# EAGLE board CCS811-Panel (EAGLE 7.6.0)
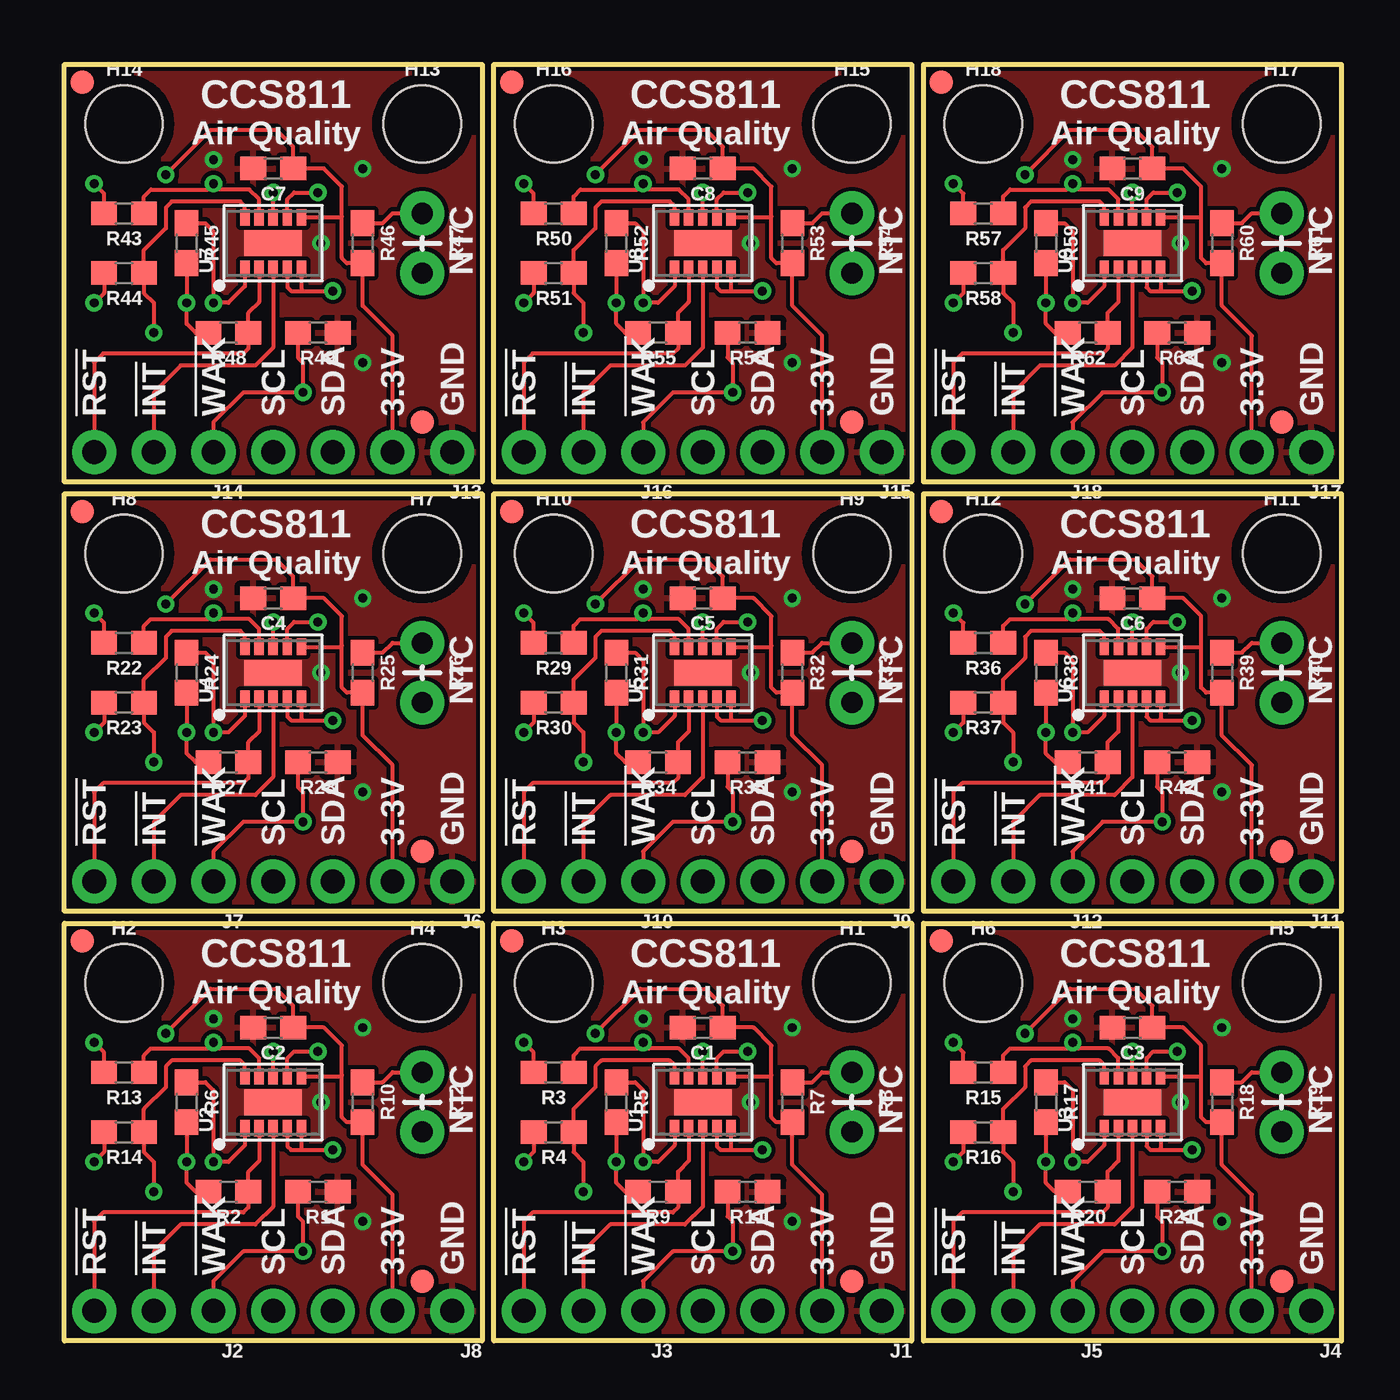
[diagram p0: board, top side]
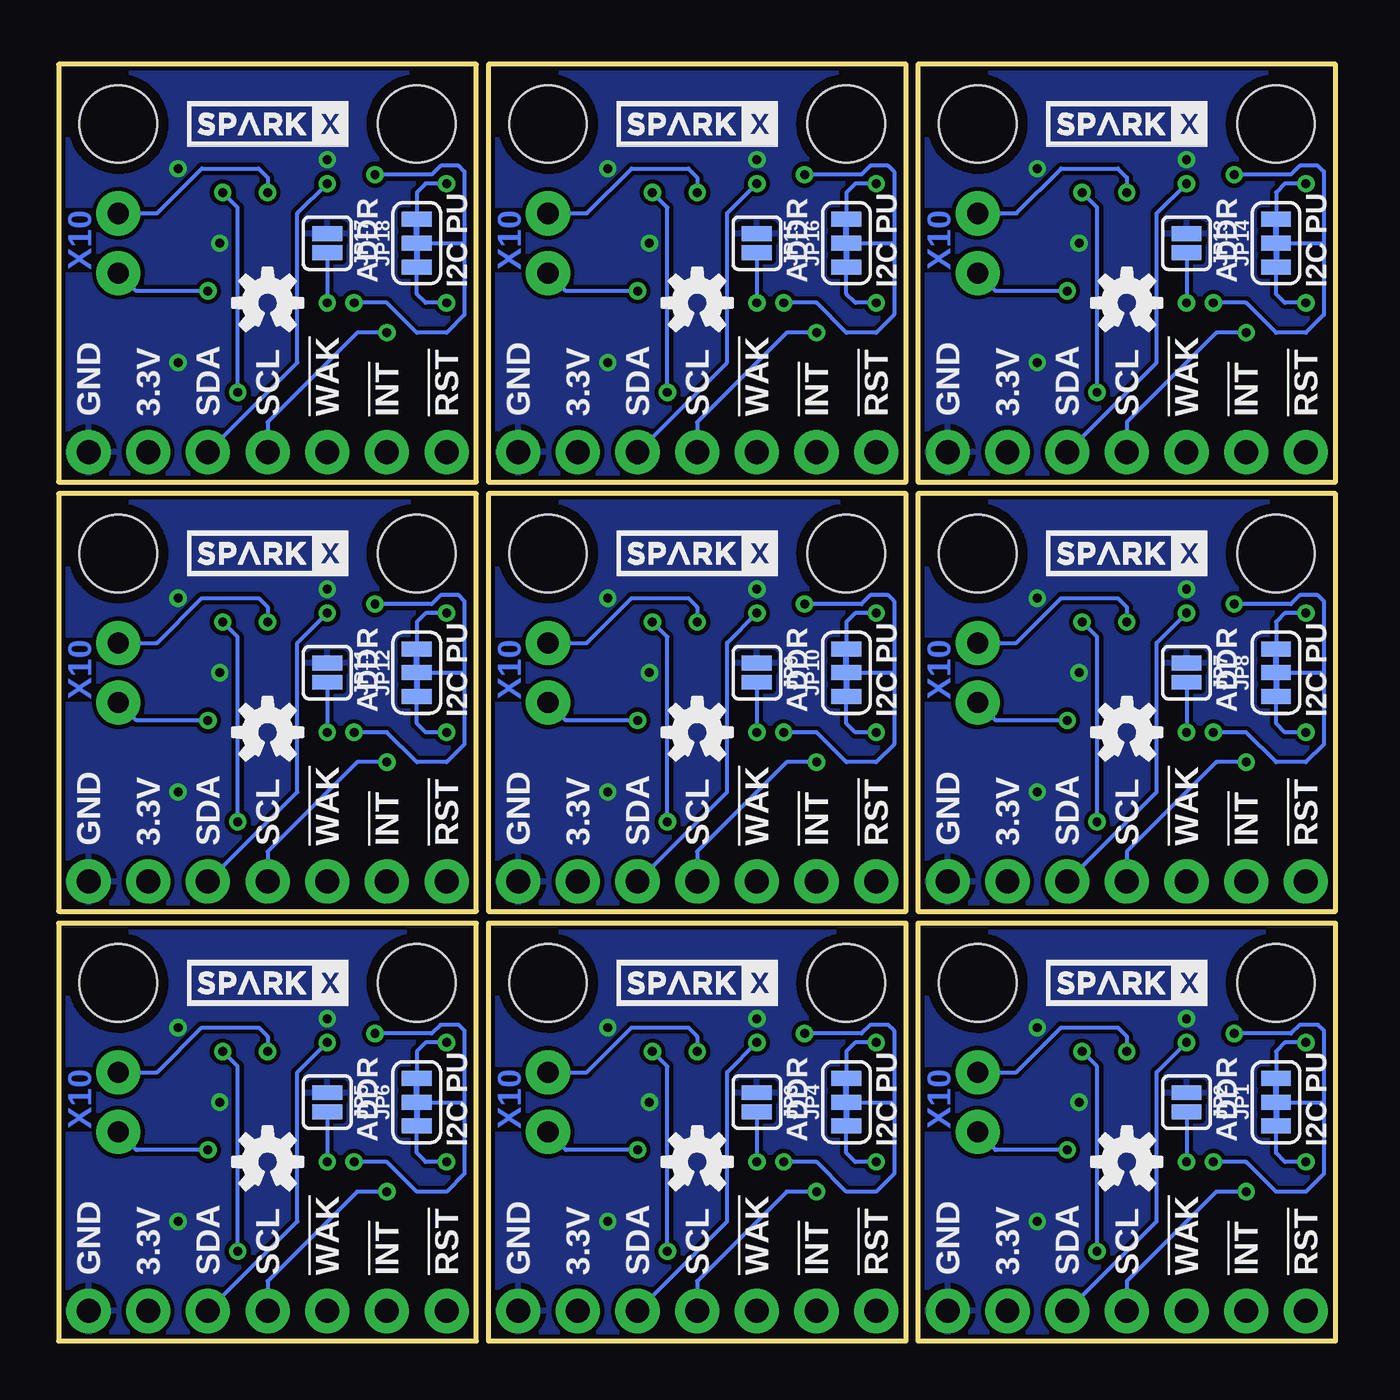
[diagram p1: board, bottom side, seen from below]

Size 54.36 x 54.36 mm. Coordinates in mm from the lower left corner, seen from the top.
Outline: 0,0 0,17.78 17.78,17.78 17.78,0 0,0
Outline: 18.29,0 18.29,17.78 36.07,17.78 36.07,0 18.29,0
Outline: 36.58,0 36.58,17.78 54.36,17.78 54.36,0 36.58,0
Outline: 0,18.29 0,36.07 17.78,36.07 17.78,18.29 0,18.29
Outline: 18.29,18.29 18.29,36.07 36.07,36.07 36.07,18.29 18.29,18.29
Outline: 36.58,18.29 36.58,36.07 54.36,36.07 54.36,18.29 36.58,18.29
Outline: 0,36.58 0,54.36 17.78,54.36 17.78,36.58 0,36.58
Outline: 18.29,36.58 18.29,54.36 36.07,54.36 36.07,36.58 18.29,36.58
Outline: 36.58,36.58 36.58,54.36 54.36,54.36 54.36,36.58 36.58,36.58
Copper layers (1*16): Top 0.035mm / dielectric 1.5mm / Bottom 0.035mm
Design rules "SparkFun-2-layer-TIGHT": minimum track width 7mil, minimum drill 15mil, track to track 7mil, track to pad 7mil, pad to pad 7mil, via to via 7mil, smd to smd 7mil, copper to edge 7mil, drill to drill 7mil, minimum pad ring 7mil, minimum via ring 7mil, stop-mask expansion 4mil, vias tented up to drill 25mil, thermal gap 10mil

## Footprints (pad centres in the part's own frame; a part is rotated, then mirrored left to right if it is on the bottom)
0603 = smd 1.1 x 1: 1 -0.85,0; 2 0.85,0
FIDUCIAL-1X2 = smd 1 x 1: 1 0,0
STAND-OFF = hole 3.302: 0,0
1X04_NO_SILK = drill 1.016 pad 1.88: 1 0,0; 2 2.54,0; 3 5.08,0; 4 7.62,0
1X03_NO_SILK = drill 1.016 pad 1.88: 1 0,0; 2 2.54,0; 3 5.08,0
SMT-JUMPER_3_2-NC_TRACE_SILK = smd 0.635 x 1.27: 1 -1.016,0; 2 0,0; 3 1.016,0
SMT-JUMPER_2_NO_SILK = smd 0.635 x 1.27: 1 -0.406,0; 2 0.406,0
AXIAL-0.1 = drill 0.9 pad 1.88: P$1 -1.27,0; P$2 1.27,0
LGA10 = smd 0.7 x 0.4: 1 -1.1,1.2; 2 -1.1,0.6; 3 -1.1,0; 4 -1.1,-0.6; 5 -1.1,-1.2; 6 1.1,-1.2; 7 1.1,-0.6; 8 1.1,0; 9 1.1,0.6; 10 1.1,1.2 | smd 1.1 x 2.45: EP 0,0

## Placement (x,y rotation side)
C1  1.0uF  [0603]  27.18,13.34 180 top
C2  1.0uF  [0603]  8.89,13.34 180 top
C3  1.0uF  [0603]  45.47,13.34 180 top
C4  1.0uF  [0603]  8.89,31.62 180 top
C5  1.0uF  [0603]  27.18,31.62 180 top
C6  1.0uF  [0603]  45.47,31.62 180 top
C7  1.0uF  [0603]  8.89,49.91 180 top
C8  1.0uF  [0603]  27.18,49.91 180 top
C9  1.0uF  [0603]  45.47,49.91 180 top
FD1  FIDUCIAL1X2  [FIDUCIAL-1X2]  0.76,17.02 0 top
FD2  FIDUCIAL1X2  [FIDUCIAL-1X2]  15.24,2.54 0 top
FD3  FIDUCIAL1X2  [FIDUCIAL-1X2]  19.05,17.02 0 top
FD4  FIDUCIAL1X2  [FIDUCIAL-1X2]  33.53,2.54 0 top
FD5  FIDUCIAL1X2  [FIDUCIAL-1X2]  37.34,17.02 0 top
FD6  FIDUCIAL1X2  [FIDUCIAL-1X2]  51.82,2.54 0 top
FD7  FIDUCIAL1X2  [FIDUCIAL-1X2]  0.76,35.31 0 top
FD8  FIDUCIAL1X2  [FIDUCIAL-1X2]  15.24,20.83 0 top
FD9  FIDUCIAL1X2  [FIDUCIAL-1X2]  19.05,35.31 0 top
FD10  FIDUCIAL1X2  [FIDUCIAL-1X2]  33.53,20.83 0 top
FD11  FIDUCIAL1X2  [FIDUCIAL-1X2]  37.34,35.31 0 top
FD12  FIDUCIAL1X2  [FIDUCIAL-1X2]  51.82,20.83 0 top
FD13  FIDUCIAL1X2  [FIDUCIAL-1X2]  0.76,53.59 0 top
FD14  FIDUCIAL1X2  [FIDUCIAL-1X2]  15.24,39.12 0 top
FD15  FIDUCIAL1X2  [FIDUCIAL-1X2]  19.05,53.59 0 top
FD16  FIDUCIAL1X2  [FIDUCIAL-1X2]  33.53,39.12 0 top
FD17  FIDUCIAL1X2  [FIDUCIAL-1X2]  37.34,53.59 0 top
FD18  FIDUCIAL1X2  [FIDUCIAL-1X2]  51.82,39.12 0 top
H1  STAND-OFF  [STAND-OFF]  33.53,15.24 0 top
H2  STAND-OFF  [STAND-OFF]  2.54,15.24 0 top
H3  STAND-OFF  [STAND-OFF]  20.83,15.24 0 top
H4  STAND-OFF  [STAND-OFF]  15.24,15.24 0 top
H5  STAND-OFF  [STAND-OFF]  51.82,15.24 0 top
H6  STAND-OFF  [STAND-OFF]  39.12,15.24 0 top
H7  STAND-OFF  [STAND-OFF]  15.24,33.53 0 top
H8  STAND-OFF  [STAND-OFF]  2.54,33.53 0 top
H9  STAND-OFF  [STAND-OFF]  33.53,33.53 0 top
H10  STAND-OFF  [STAND-OFF]  20.83,33.53 0 top
H11  STAND-OFF  [STAND-OFF]  51.82,33.53 0 top
H12  STAND-OFF  [STAND-OFF]  39.12,33.53 0 top
H13  STAND-OFF  [STAND-OFF]  15.24,51.82 0 top
H14  STAND-OFF  [STAND-OFF]  2.54,51.82 0 top
H15  STAND-OFF  [STAND-OFF]  33.53,51.82 0 top
H16  STAND-OFF  [STAND-OFF]  20.83,51.82 0 top
H17  STAND-OFF  [STAND-OFF]  51.82,51.82 0 top
H18  STAND-OFF  [STAND-OFF]  39.12,51.82 0 top
J1  [1X04_NO_SILK]  34.8,1.27 180 top
J2  [1X03_NO_SILK]  6.35,1.27 180 top
J3  [1X03_NO_SILK]  24.64,1.27 180 top
J4  [1X04_NO_SILK]  53.09,1.27 180 top
J5  [1X03_NO_SILK]  42.93,1.27 180 top
J6  [1X04_NO_SILK]  16.51,19.56 180 top
J7  [1X03_NO_SILK]  6.35,19.56 180 top
J8  [1X04_NO_SILK]  16.51,1.27 180 top
J9  [1X04_NO_SILK]  34.8,19.56 180 top
J10  [1X03_NO_SILK]  24.64,19.56 180 top
J11  [1X04_NO_SILK]  53.09,19.56 180 top
J12  [1X03_NO_SILK]  42.93,19.56 180 top
J13  [1X04_NO_SILK]  16.51,37.85 180 top
J14  [1X03_NO_SILK]  6.35,37.85 180 top
J15  [1X04_NO_SILK]  34.8,37.85 180 top
J16  [1X03_NO_SILK]  24.64,37.85 180 top
J17  [1X04_NO_SILK]  53.09,37.85 180 top
J18  [1X03_NO_SILK]  42.93,37.85 180 top
JP1  [SMT-JUMPER_3_2-NC_TRACE_SILK]  2.54,10.16 90 bottom
JP2  [SMT-JUMPER_2_NO_SILK]  6.35,10.16 270 bottom
JP3  [SMT-JUMPER_2_NO_SILK]  24.64,10.16 270 bottom
JP4  [SMT-JUMPER_3_2-NC_TRACE_SILK]  20.83,10.16 90 bottom
JP5  [SMT-JUMPER_2_NO_SILK]  42.93,10.16 270 bottom
JP6  [SMT-JUMPER_3_2-NC_TRACE_SILK]  39.12,10.16 90 bottom
JP7  [SMT-JUMPER_2_NO_SILK]  6.35,28.45 270 bottom
JP8  [SMT-JUMPER_3_2-NC_TRACE_SILK]  2.54,28.45 90 bottom
JP9  [SMT-JUMPER_2_NO_SILK]  24.64,28.45 270 bottom
JP10  [SMT-JUMPER_3_2-NC_TRACE_SILK]  20.83,28.45 90 bottom
JP11  [SMT-JUMPER_2_NO_SILK]  42.93,28.45 270 bottom
JP12  [SMT-JUMPER_3_2-NC_TRACE_SILK]  39.12,28.45 90 bottom
JP13  [SMT-JUMPER_2_NO_SILK]  6.35,46.74 270 bottom
JP14  [SMT-JUMPER_3_2-NC_TRACE_SILK]  2.54,46.74 90 bottom
JP15  [SMT-JUMPER_2_NO_SILK]  24.64,46.74 270 bottom
JP16  [SMT-JUMPER_3_2-NC_TRACE_SILK]  20.83,46.74 90 bottom
JP17  [SMT-JUMPER_2_NO_SILK]  42.93,46.74 270 bottom
JP18  [SMT-JUMPER_3_2-NC_TRACE_SILK]  39.12,46.74 90 bottom
LOGO1  OSHW-LOGOS  [OSHW-LOGO-S]  27.18,7.62 0 bottom
LOGO2  OSHW-LOGOS  [OSHW-LOGO-S]  45.47,7.62 0 bottom
LOGO3  OSHW-LOGOS  [OSHW-LOGO-S]  8.89,25.91 0 bottom
LOGO4  OSHW-LOGOS  [OSHW-LOGO-S]  8.89,7.62 0 bottom
LOGO5  OSHW-LOGOS  [OSHW-LOGO-S]  27.18,25.91 0 bottom
LOGO6  OSHW-LOGOS  [OSHW-LOGO-S]  45.47,25.91 0 bottom
LOGO7  OSHW-LOGOS  [OSHW-LOGO-S]  8.89,44.2 0 bottom
LOGO8  OSHW-LOGOS  [OSHW-LOGO-S]  27.18,44.2 0 bottom
LOGO9  OSHW-LOGOS  [OSHW-LOGO-S]  45.47,44.2 0 bottom
R1  100k  [0603]  10.79,6.35 180 top
R2  4.7k  [0603]  6.99,6.35 180 top
R3  4.7k  [0603]  20.83,11.43 180 top
R4  4.7k  [0603]  20.83,8.89 180 top
R5  100k  [0603]  23.5,10.16 270 top
R6  100k  [0603]  5.21,10.16 270 top
R7  10k  [0603]  30.99,10.16 270 top
R8  DNP  [AXIAL-0.1]  33.53,10.16 270 top
R9  4.7k  [0603]  25.27,6.35 180 top
R10  10k  [0603]  12.7,10.16 270 top
R11  100k  [0603]  29.08,6.35 180 top
R12  DNP  [AXIAL-0.1]  15.24,10.16 270 top
R13  4.7k  [0603]  2.54,11.43 180 top
R14  4.7k  [0603]  2.54,8.89 180 top
R15  4.7k  [0603]  39.12,11.43 180 top
R16  4.7k  [0603]  39.12,8.89 180 top
R17  100k  [0603]  41.78,10.16 270 top
R18  10k  [0603]  49.28,10.16 270 top
R19  DNP  [AXIAL-0.1]  51.82,10.16 270 top
R20  4.7k  [0603]  43.56,6.35 180 top
R21  100k  [0603]  47.37,6.35 180 top
R22  4.7k  [0603]  2.54,29.72 180 top
R23  4.7k  [0603]  2.54,27.18 180 top
R24  100k  [0603]  5.21,28.45 270 top
R25  10k  [0603]  12.7,28.45 270 top
R26  DNP  [AXIAL-0.1]  15.24,28.45 270 top
R27  4.7k  [0603]  6.99,24.64 180 top
R28  100k  [0603]  10.79,24.64 180 top
R29  4.7k  [0603]  20.83,29.72 180 top
R30  4.7k  [0603]  20.83,27.18 180 top
R31  100k  [0603]  23.5,28.45 270 top
R32  10k  [0603]  30.99,28.45 270 top
R33  DNP  [AXIAL-0.1]  33.53,28.45 270 top
R34  4.7k  [0603]  25.27,24.64 180 top
R35  100k  [0603]  29.08,24.64 180 top
R36  4.7k  [0603]  39.12,29.72 180 top
R37  4.7k  [0603]  39.12,27.18 180 top
R38  100k  [0603]  41.78,28.45 270 top
R39  10k  [0603]  49.28,28.45 270 top
R40  DNP  [AXIAL-0.1]  51.82,28.45 270 top
R41  4.7k  [0603]  43.56,24.64 180 top
R42  100k  [0603]  47.37,24.64 180 top
R43  4.7k  [0603]  2.54,48.01 180 top
R44  4.7k  [0603]  2.54,45.47 180 top
R45  100k  [0603]  5.21,46.74 270 top
R46  10k  [0603]  12.7,46.74 270 top
R47  DNP  [AXIAL-0.1]  15.24,46.74 270 top
R48  4.7k  [0603]  6.99,42.93 180 top
R49  100k  [0603]  10.79,42.93 180 top
R50  4.7k  [0603]  20.83,48.01 180 top
R51  4.7k  [0603]  20.83,45.47 180 top
R52  100k  [0603]  23.5,46.74 270 top
R53  10k  [0603]  30.99,46.74 270 top
R54  DNP  [AXIAL-0.1]  33.53,46.74 270 top
R55  4.7k  [0603]  25.27,42.93 180 top
R56  100k  [0603]  29.08,42.93 180 top
R57  4.7k  [0603]  39.12,48.01 180 top
R58  4.7k  [0603]  39.12,45.47 180 top
R59  100k  [0603]  41.78,46.74 270 top
R60  10k  [0603]  49.28,46.74 270 top
R61  DNP  [AXIAL-0.1]  51.82,46.74 270 top
R62  4.7k  [0603]  43.56,42.93 180 top
R63  100k  [0603]  47.37,42.93 180 top
U1  CCS811PRODUCTION  [LGA10]  27.18,10.16 90 top
U2  CCS811PRODUCTION  [LGA10]  8.89,10.16 90 top
U3  CCS811PRODUCTION  [LGA10]  45.47,10.16 90 top
U4  CCS811PRODUCTION  [LGA10]  8.89,28.45 90 top
U5  CCS811PRODUCTION  [LGA10]  27.18,28.45 90 top
U6  CCS811PRODUCTION  [LGA10]  45.47,28.45 90 top
U7  CCS811PRODUCTION  [LGA10]  8.89,46.74 90 top
U8  CCS811PRODUCTION  [LGA10]  27.18,46.74 90 top
U9  CCS811PRODUCTION  [LGA10]  45.47,46.74 90 top
U$1  SPARKX-LOGO3  [SPARKX-SMALL]  8.89,15.24 0 bottom
U$2  SPARKX-LOGO3  [SPARKX-SMALL]  27.18,15.24 0 bottom
U$3  SPARKX-LOGO3  [SPARKX-SMALL]  45.47,15.24 0 bottom
U$4  SPARKX-LOGO3  [SPARKX-SMALL]  8.89,33.53 0 bottom
U$5  SPARKX-LOGO3  [SPARKX-SMALL]  27.18,33.53 0 bottom
U$6  SPARKX-LOGO3  [SPARKX-SMALL]  45.47,33.53 0 bottom
U$7  SPARKX-LOGO3  [SPARKX-SMALL]  8.89,51.82 0 bottom
U$8  SPARKX-LOGO3  [SPARKX-SMALL]  27.18,51.82 0 bottom
U$9  SPARKX-LOGO3  [SPARKX-SMALL]  45.47,51.82 0 bottom

## Library data of the parts
C1-C9 = SparkFun-Capacitors; PROD_ID: CAP-00868
FD1-FD18 LOGO1-LOGO9 = SparkFun-Aesthetics
H1-H18 = SparkFun-Hardware
J1-J18 = SparkFun-Connectors
JP1-JP18 = SparkFun-Jumpers
R1 R5 R6 R11 R17 R21 R24 R28 R31 R35 R38 R42 R45 R49 R52 R56 R59 R63 = SparkFun-Resistors; PROD_ID: RES-07828
R2-R4 R9 R13-R16 R20 R22 R23 R27 R29 R30 R34 R36 R37 R41 R43 R44 R48 R50 R51 R55 R57 R58 R62 = SparkFun-Resistors; PROD_ID: RES-07857
R7 R10 R18 R25 R32 R39 R46 R53 R60 = SparkFun-Resistors; PROD_ID: RES-00824
R8 R12 R19 R26 R33 R40 R47 R54 R61 = esp32-environ-monitor-temp; PROD_ID: N/A; SF_ID: SEN-00250
U1-U9 U$1-U$9 = SparkX

## Nets
3.3V: C2.1 J8.2 JP1.2 R2.2 R6.2 R10.2 U2.6
3.3V1: C1.1 J1.2 JP4.2 R5.2 R7.2 R9.2 U1.6
3.3V2: C3.1 J4.2 JP6.2 R17.2 R18.2 R20.2 U3.6
3.3V3: C4.1 J6.2 JP8.2 R24.2 R25.2 R27.2 U4.6
3.3V4: C5.1 J9.2 JP10.2 R31.2 R32.2 R34.2 U5.6
3.3V5: C6.1 J11.2 JP12.2 R38.2 R39.2 R41.2 U6.6
3.3V6: C7.1 J13.2 JP14.2 R45.2 R46.2 R48.2 U7.6
3.3V7: C8.1 J15.2 JP16.2 R52.2 R53.2 R55.2 U8.6
3.3V8: C9.1 J17.2 JP18.2 R59.2 R60.2 R62.2 U9.6
!INT: J2.2 U2.3
!INT1: J3.2 U1.3
!INT2: J5.2 U3.3
!INT3: J7.2 U4.3
!INT4: J10.2 U5.3
!INT5: J12.2 U6.3
!INT6: J14.2 U7.3
!INT7: J16.2 U8.3
!INT8: J18.2 U9.3
!RST: J2.3 R2.1 U2.2
!RST1: J3.3 R9.1 U1.2
!RST2: J5.3 R20.1 U3.2
!RST3: J7.3 R27.1 U4.2
!RST4: J10.3 R34.1 U5.2
!RST5: J12.3 R41.1 U6.2
!RST6: J14.3 R48.1 U7.2
!RST7: J16.3 R55.1 U8.2
!RST8: J18.3 R62.1 U9.2
!WAKE: J2.1 R1.2 U2.7
!WAKE1: J3.1 R11.2 U1.7
!WAKE2: J5.1 R21.2 U3.7
!WAKE3: J7.1 R28.2 U4.7
!WAKE4: J10.1 R35.2 U5.7
!WAKE5: J12.1 R42.2 U6.7
!WAKE6: J14.1 R49.2 U7.7
!WAKE7: J16.1 R56.2 U8.7
!WAKE8: J18.1 R63.2 U9.7
AUX: R10.1 R12.P$1 U2.8
AUX1: R7.1 R8.P$1 U1.8
AUX2: R18.1 R19.P$1 U3.8
AUX3: R25.1 R26.P$1 U4.8
AUX4: R32.1 R33.P$1 U5.8
AUX5: R39.1 R40.P$1 U6.8
AUX6: R46.1 R47.P$1 U7.8
AUX7: R53.1 R54.P$1 U8.8
AUX8: R60.1 R61.P$1 U9.8
CCS811_ADDR: JP2.2 R6.1 U2.1
CCS811_ADDR1: JP3.2 R5.1 U1.1
CCS811_ADDR2: JP5.2 R17.1 U3.1
CCS811_ADDR3: JP7.2 R24.1 U4.1
CCS811_ADDR4: JP9.2 R31.1 U5.1
CCS811_ADDR5: JP11.2 R38.1 U6.1
CCS811_ADDR6: JP13.2 R45.1 U7.1
CCS811_ADDR7: JP15.2 R52.1 U8.1
CCS811_ADDR8: JP17.2 R59.1 U9.1
GND: C2.2 J8.1 JP2.1 R1.1 U2.EP
GND1: C1.2 J1.1 JP3.1 R11.1 U1.EP
GND2: C3.2 J4.1 JP5.1 R21.1 U3.EP
GND3: C4.2 J6.1 JP7.1 R28.1 U4.EP
GND4: C5.2 J9.1 JP9.1 R35.1 U5.EP
GND5: C6.2 J11.1 JP11.1 R42.1 U6.EP
GND6: C7.2 J13.1 JP13.1 R49.1 U7.EP
GND7: C8.2 J15.1 JP15.1 R56.1 U8.EP
GND8: C9.2 J17.1 JP17.1 R63.1 U9.EP
N$1: JP4.3 R3.2
N$2: JP4.1 R4.2
N$3: JP6.3 R15.2
N$4: JP1.3 R13.2
N$5: JP1.1 R14.2
N$6: JP6.1 R16.2
N$7: JP8.3 R22.2
N$8: JP8.1 R23.2
N$9: JP10.3 R29.2
N$10: JP10.1 R30.2
N$11: JP12.3 R36.2
N$12: JP12.1 R37.2
N$13: JP14.3 R43.2
N$14: JP14.1 R44.2
N$15: JP16.3 R50.2
N$16: JP16.1 R51.2
N$17: JP18.3 R57.2
N$18: JP18.1 R58.2
NTC_SENSE: R12.P$2 U2.4 U2.5
NTC_SENSE1: R8.P$2 U1.4 U1.5
NTC_SENSE2: R19.P$2 U3.4 U3.5
NTC_SENSE3: R26.P$2 U4.4 U4.5
NTC_SENSE4: R33.P$2 U5.4 U5.5
NTC_SENSE5: R40.P$2 U6.4 U6.5
NTC_SENSE6: R47.P$2 U7.4 U7.5
NTC_SENSE7: R54.P$2 U8.4 U8.5
NTC_SENSE8: R61.P$2 U9.4 U9.5
SCL: J8.4 R14.1 U2.10
SCL1: J1.4 R4.1 U1.10
SCL2: J4.4 R16.1 U3.10
SCL3: J6.4 R23.1 U4.10
SCL4: J9.4 R30.1 U5.10
SCL5: J11.4 R37.1 U6.10
SCL6: J13.4 R44.1 U7.10
SCL7: J15.4 R51.1 U8.10
SCL8: J17.4 R58.1 U9.10
SDA: J8.3 R13.1 U2.9
SDA1: J1.3 R3.1 U1.9
SDA2: J4.3 R15.1 U3.9
SDA3: J6.3 R22.1 U4.9
SDA4: J9.3 R29.1 U5.9
SDA5: J11.3 R36.1 U6.9
SDA6: J13.3 R43.1 U7.9
SDA7: J15.3 R50.1 U8.9
SDA8: J17.3 R57.1 U9.9

## Tracks (layer width: path | path; a pad name or v marks a point on that pad's centre or on a via)
3.3V  (via drill 0.38)
  Top 0.178: J8.2 13.97,6.22 12.7,7.49 R10.2 12.03,9.31 11.81,9.53 11.81,11.3 | U2.6 11.77,11.26 11.81,11.3 | v4.32,13.08 6.22,14.99 9.02,14.99 9.74,14.26 C2.1 11.05,13.34 11.81,12.57 11.81,11.3 | R6.2 v5.21,7.62 5.21,6.73 5.59,6.35 R2.2
  Bottom 0.178: v4.32,13.08 1.91,13.08 1.52,13.46 0.76,13.46 0.51,13.21 0.51,10.16 | 0.51,10.16 0.51,7.11 1.27,6.35 2.54,6.35 3.81,7.62 v5.21,7.62 | JP1.2 0.51,10.16
3.3V1  (via drill 0.38)
  Top 0.178: J1.2 32.26,6.22 30.99,7.49 R7.2 30.31,9.31 30.1,9.53 30.1,11.3 | U1.6 30.06,11.26 30.1,11.3 | v22.61,13.08 24.51,14.99 27.3,14.99 28.03,14.26 C1.1 29.34,13.34 30.1,12.57 30.1,11.3 | R5.2 v23.5,7.62 23.5,6.73 23.88,6.35 R9.2
  Bottom 0.178: v22.61,13.08 20.19,13.08 19.81,13.46 19.05,13.46 18.8,13.21 18.8,10.16 | 18.8,10.16 18.8,7.11 19.56,6.35 20.83,6.35 22.1,7.62 v23.5,7.62 | JP4.2 18.8,10.16
3.3V2  (via drill 0.38)
  Top 0.178: J4.2 50.55,6.22 49.28,7.49 R18.2 48.6,9.31 48.39,9.53 48.39,11.3 | U3.6 48.34,11.26 48.39,11.3 | v40.89,13.08 42.8,14.99 45.59,14.99 46.32,14.26 C3.1 47.62,13.34 48.39,12.57 48.39,11.3 | R17.2 v41.78,7.62 41.78,6.73 42.16,6.35 R20.2
  Bottom 0.178: v40.89,13.08 38.48,13.08 38.1,13.46 37.34,13.46 37.08,13.21 37.08,10.16 | 37.08,10.16 37.08,7.11 37.85,6.35 39.12,6.35 40.39,7.62 v41.78,7.62 | JP6.2 37.08,10.16
3.3V3  (via drill 0.38)
  Top 0.178: J6.2 13.97,24.51 12.7,25.78 R25.2 12.03,27.6 11.81,27.81 11.81,29.59 | U4.6 11.77,29.55 11.81,29.59 | v4.32,31.37 6.22,33.27 9.02,33.27 9.74,32.55 C4.1 11.05,31.62 11.81,30.86 11.81,29.59 | R24.2 v5.21,25.91 5.21,25.02 5.59,24.64 R27.2
  Bottom 0.178: v4.32,31.37 1.91,31.37 1.52,31.75 0.76,31.75 0.51,31.5 0.51,28.45 | 0.51,28.45 0.51,25.4 1.27,24.64 2.54,24.64 3.81,25.91 v5.21,25.91 | JP8.2 0.51,28.45
3.3V4  (via drill 0.38)
  Top 0.178: J9.2 32.26,24.51 30.99,25.78 R32.2 30.31,27.6 30.1,27.81 30.1,29.59 | U5.6 30.06,29.55 30.1,29.59 | v22.61,31.37 24.51,33.27 27.3,33.27 28.03,32.55 C5.1 29.34,31.62 30.1,30.86 30.1,29.59 | R31.2 v23.5,25.91 23.5,25.02 23.88,24.64 R34.2
  Bottom 0.178: v22.61,31.37 20.19,31.37 19.81,31.75 19.05,31.75 18.8,31.5 18.8,28.45 | 18.8,28.45 18.8,25.4 19.56,24.64 20.83,24.64 22.1,25.91 v23.5,25.91 | JP10.2 18.8,28.45
3.3V5  (via drill 0.38)
  Top 0.178: J11.2 50.55,24.51 49.28,25.78 R39.2 48.6,27.6 48.39,27.81 48.39,29.59 | U6.6 48.34,29.55 48.39,29.59 | v40.89,31.37 42.8,33.27 45.59,33.27 46.32,32.55 C6.1 47.62,31.62 48.39,30.86 48.39,29.59 | R38.2 v41.78,25.91 41.78,25.02 42.16,24.64 R41.2
  Bottom 0.178: v40.89,31.37 38.48,31.37 38.1,31.75 37.34,31.75 37.08,31.5 37.08,28.45 | 37.08,28.45 37.08,25.4 37.85,24.64 39.12,24.64 40.39,25.91 v41.78,25.91 | JP12.2 37.08,28.45
3.3V6  (via drill 0.38)
  Top 0.178: J13.2 13.97,42.8 12.7,44.07 R46.2 12.03,45.89 11.81,46.1 11.81,47.88 | U7.6 11.77,47.84 11.81,47.88 | v4.32,49.66 6.22,51.56 9.02,51.56 9.74,50.84 C7.1 11.05,49.91 11.81,49.15 11.81,47.88 | R45.2 v5.21,44.2 5.21,43.31 5.59,42.93 R48.2
  Bottom 0.178: v4.32,49.66 1.91,49.66 1.52,50.04 0.76,50.04 0.51,49.78 0.51,46.74 | 0.51,46.74 0.51,43.69 1.27,42.93 2.54,42.93 3.81,44.2 v5.21,44.2 | JP14.2 0.51,46.74
3.3V7  (via drill 0.38)
  Top 0.178: J15.2 32.26,42.8 30.99,44.07 R53.2 30.31,45.89 30.1,46.1 30.1,47.88 | U8.6 30.06,47.84 30.1,47.88 | v22.61,49.66 24.51,51.56 27.3,51.56 28.03,50.84 C8.1 29.34,49.91 30.1,49.15 30.1,47.88 | R52.2 v23.5,44.2 23.5,43.31 23.88,42.93 R55.2
  Bottom 0.178: v22.61,49.66 20.19,49.66 19.81,50.04 19.05,50.04 18.8,49.78 18.8,46.74 | 18.8,46.74 18.8,43.69 19.56,42.93 20.83,42.93 22.1,44.2 v23.5,44.2 | JP16.2 18.8,46.74
3.3V8  (via drill 0.38)
  Top 0.178: J17.2 50.55,42.8 49.28,44.07 R60.2 48.6,45.89 48.39,46.1 48.39,47.88 | U9.6 48.34,47.84 48.39,47.88 | v40.89,49.66 42.8,51.56 45.59,51.56 46.32,50.84 C9.1 47.62,49.91 48.39,49.15 48.39,47.88 | R59.2 v41.78,44.2 41.78,43.31 42.16,42.93 R62.2
  Bottom 0.178: v40.89,49.66 38.48,49.66 38.1,50.04 37.34,50.04 37.08,49.78 37.08,46.74 | 37.08,46.74 37.08,43.69 37.85,42.93 39.12,42.93 40.39,44.2 v41.78,44.2 | JP18.2 37.08,46.74
!INT
  Top 0.178: U2.3 8.89,5.71 8.13,4.95 4.95,4.95 3.81,3.81 J2.2
!INT1
  Top 0.178: U1.3 27.18,5.71 26.42,4.95 23.24,4.95 22.1,3.81 J3.2
!INT2
  Top 0.178: U3.3 45.47,5.71 44.7,4.95 41.53,4.95 40.39,3.81 J5.2
!INT3
  Top 0.178: U4.3 8.89,24 8.13,23.24 4.95,23.24 3.81,22.1 J7.2
!INT4
  Top 0.178: U5.3 27.18,24 26.42,23.24 23.24,23.24 22.1,22.1 J10.2
!INT5
  Top 0.178: U6.3 45.47,24 44.7,23.24 41.53,23.24 40.39,22.1 J12.2
!INT6
  Top 0.178: U7.3 8.89,42.29 8.13,41.53 4.95,41.53 3.81,40.39 J14.2
!INT7
  Top 0.178: U8.3 27.18,42.29 26.42,41.53 23.24,41.53 22.1,40.39 J16.2
!INT8
  Top 0.178: U9.3 45.47,42.29 44.7,41.53 41.53,41.53 40.39,40.39 J18.2
!RST
  Top 0.178: U2.2 8.29,7.66 7.83,7.2 R2.1 7.83,5.68 7.62,5.46 1.65,5.46 1.27,5.08 J2.3
!RST1
  Top 0.178: U1.2 26.58,7.66 26.12,7.2 R9.1 26.12,5.68 25.91,5.46 19.94,5.46 19.56,5.08 J3.3
!RST2
  Top 0.178: U3.2 44.87,7.66 44.41,7.2 R20.1 44.41,5.68 44.2,5.46 38.23,5.46 37.85,5.08 J5.3
!RST3
  Top 0.178: U4.2 8.29,25.94 7.83,25.49 R27.1 7.83,23.96 7.62,23.75 1.65,23.75 1.27,23.37 J7.3
!RST4
  Top 0.178: U5.2 26.58,25.94 26.12,25.49 R34.1 26.12,23.96 25.91,23.75 19.94,23.75 19.56,23.37 J10.3
!RST5
  Top 0.178: U6.2 44.87,25.94 44.41,25.49 R41.1 44.41,23.96 44.2,23.75 38.23,23.75 37.85,23.37 J12.3
!RST6
  Top 0.178: U7.2 8.29,44.23 7.83,43.78 R48.1 7.83,42.25 7.62,42.04 1.65,42.04 1.27,41.66 J14.3
!RST7
  Top 0.178: U8.2 26.58,44.23 26.12,43.78 R55.1 26.12,42.25 25.91,42.04 19.94,42.04 19.56,41.66 J16.3
!RST8
  Top 0.178: U9.2 44.87,44.23 44.41,43.78 R62.1 44.41,42.25 44.2,42.04 38.23,42.04 37.85,41.66 J18.3
!WAKE  (via drill 0.38)
  Top 0.178: U2.7 9.49,12.03 9.78,12.32 v10.79,12.32 | J2.1 6.35,2.54 7.62,3.81 v10.16,3.81 10.16,5.08 9.95,5.29 R1.2
  Bottom 0.178: v10.16,3.81 10.16,11.68 v10.79,12.32
!WAKE1  (via drill 0.38)
  Top 0.178: U1.7 27.78,12.03 28.07,12.32 v29.08,12.32 | J3.1 24.64,2.54 25.91,3.81 v28.45,3.81 28.45,5.08 28.23,5.29 R11.2
  Bottom 0.178: v28.45,3.81 28.45,11.68 v29.08,12.32
!WAKE2  (via drill 0.38)
  Top 0.178: U3.7 46.07,12.03 46.35,12.32 v47.37,12.32 | J5.1 42.93,2.54 44.2,3.81 v46.74,3.81 46.74,5.08 46.52,5.29 R21.2
  Bottom 0.178: v46.74,3.81 46.74,11.68 v47.37,12.32
!WAKE3  (via drill 0.38)
  Top 0.178: U4.7 9.49,30.32 9.78,30.61 v10.79,30.61 | J7.1 6.35,20.83 7.62,22.1 v10.16,22.1 10.16,23.37 9.95,23.58 R28.2
  Bottom 0.178: v10.16,22.1 10.16,29.97 v10.79,30.61
!WAKE4  (via drill 0.38)
  Top 0.178: U5.7 27.78,30.32 28.07,30.61 v29.08,30.61 | J10.1 24.64,20.83 25.91,22.1 v28.45,22.1 28.45,23.37 28.23,23.58 R35.2
  Bottom 0.178: v28.45,22.1 28.45,29.97 v29.08,30.61
!WAKE5  (via drill 0.38)
  Top 0.178: U6.7 46.07,30.32 46.35,30.61 v47.37,30.61 | J12.1 42.93,20.83 44.2,22.1 v46.74,22.1 46.74,23.37 46.52,23.58 R42.2
  Bottom 0.178: v46.74,22.1 46.74,29.97 v47.37,30.61
!WAKE6  (via drill 0.38)
  Top 0.178: U7.7 9.49,48.61 9.78,48.9 v10.79,48.9 | J14.1 6.35,39.12 7.62,40.39 v10.16,40.39 10.16,41.66 9.95,41.87 R49.2
  Bottom 0.178: v10.16,40.39 10.16,48.26 v10.79,48.9
!WAKE7  (via drill 0.38)
  Top 0.178: U8.7 27.78,48.61 28.07,48.9 v29.08,48.9 | J16.1 24.64,39.12 25.91,40.39 v28.45,40.39 28.45,41.66 28.23,41.87 R56.2
  Bottom 0.178: v28.45,40.39 28.45,48.26 v29.08,48.9
!WAKE8  (via drill 0.38)
  Top 0.178: U9.7 46.07,48.61 46.35,48.9 v47.37,48.9 | J18.1 42.93,39.12 44.2,40.39 v46.74,40.39 46.74,41.66 46.52,41.87 R63.2
  Bottom 0.178: v46.74,40.39 46.74,48.26 v47.37,48.9
AUX  (via drill 0.38)
  Top 0.178: R10.1 13.55,11.01 13.97,11.43 R12.P$1 | U2.8 v8.89,12.32
  Bottom 0.178: v8.89,12.32 8.89,12.95 9.27,13.34 11.68,13.34 13.59,11.43 R12.P$1
AUX1  (via drill 0.38)
  Top 0.178: R7.1 31.84,11.01 32.26,11.43 R8.P$1 | U1.8 v27.18,12.32
  Bottom 0.178: v27.18,12.32 27.18,12.95 27.56,13.34 29.97,13.34 31.88,11.43 R8.P$1
AUX2  (via drill 0.38)
  Top 0.178: R18.1 50.13,11.01 50.55,11.43 R19.P$1 | U3.8 v45.47,12.32
  Bottom 0.178: v45.47,12.32 45.47,12.95 45.85,13.34 48.26,13.34 50.16,11.43 R19.P$1
AUX3  (via drill 0.38)
  Top 0.178: R25.1 13.55,29.3 13.97,29.72 R26.P$1 | U4.8 v8.89,30.61
  Bottom 0.178: v8.89,30.61 8.89,31.24 9.27,31.62 11.68,31.62 13.59,29.72 R26.P$1
AUX4  (via drill 0.38)
  Top 0.178: R32.1 31.84,29.3 32.26,29.72 R33.P$1 | U5.8 v27.18,30.61
  Bottom 0.178: v27.18,30.61 27.18,31.24 27.56,31.62 29.97,31.62 31.88,29.72 R33.P$1
AUX5  (via drill 0.38)
  Top 0.178: R39.1 50.13,29.3 50.55,29.72 R40.P$1 | U6.8 v45.47,30.61
  Bottom 0.178: v45.47,30.61 45.47,31.24 45.85,31.62 48.26,31.62 50.16,29.72 R40.P$1
AUX6  (via drill 0.38)
  Top 0.178: R46.1 13.55,47.59 13.97,48.01 R47.P$1 | U7.8 v8.89,48.9
  Bottom 0.178: v8.89,48.9 8.89,49.53 9.27,49.91 11.68,49.91 13.59,48.01 R47.P$1
AUX7  (via drill 0.38)
  Top 0.178: R53.1 31.84,47.59 32.26,48.01 R54.P$1 | U8.8 v27.18,48.9
  Bottom 0.178: v27.18,48.9 27.18,49.53 27.56,49.91 29.97,49.91 31.88,48.01 R54.P$1
AUX8  (via drill 0.38)
  Top 0.178: R60.1 50.13,47.59 50.55,48.01 R61.P$1 | U9.8 v45.47,48.9
  Bottom 0.178: v45.47,48.9 45.47,49.53 45.85,49.91 48.26,49.91 50.16,48.01 R61.P$1
CCS811_ADDR  (via drill 0.38)
  Top 0.178: R6.1 6.01,11.01 6.35,10.67 v6.35,7.62 6.99,7.62 7.69,8.32 U2.1
  Bottom 0.178: JP2.2 v6.35,7.62
CCS811_ADDR1  (via drill 0.38)
  Top 0.178: R5.1 24.3,11.01 24.64,10.67 v24.64,7.62 25.27,7.62 25.98,8.32 U1.1
  Bottom 0.178: JP3.2 v24.64,7.62
CCS811_ADDR2  (via drill 0.38)
  Top 0.178: R17.1 42.58,11.01 42.93,10.67 v42.93,7.62 43.56,7.62 44.27,8.32 U3.1
  Bottom 0.178: JP5.2 v42.93,7.62
CCS811_ADDR3  (via drill 0.38)
  Top 0.178: R24.1 6.01,29.3 6.35,28.96 v6.35,25.91 6.99,25.91 7.69,26.61 U4.1
  Bottom 0.178: JP7.2 v6.35,25.91
CCS811_ADDR4  (via drill 0.38)
  Top 0.178: R31.1 24.3,29.3 24.64,28.96 v24.64,25.91 25.27,25.91 25.98,26.61 U5.1
  Bottom 0.178: JP9.2 v24.64,25.91
CCS811_ADDR5  (via drill 0.38)
  Top 0.178: R38.1 42.58,29.3 42.93,28.96 v42.93,25.91 43.56,25.91 44.27,26.61 U6.1
  Bottom 0.178: JP11.2 v42.93,25.91
CCS811_ADDR6  (via drill 0.38)
  Top 0.178: R45.1 6.01,47.59 6.35,47.24 v6.35,44.2 6.99,44.2 7.69,44.9 U7.1
  Bottom 0.178: JP13.2 v6.35,44.2
CCS811_ADDR7  (via drill 0.38)
  Top 0.178: R52.1 24.3,47.59 24.64,47.24 v24.64,44.2 25.27,44.2 25.98,44.9 U8.1
  Bottom 0.178: JP15.2 v24.64,44.2
CCS811_ADDR8  (via drill 0.38)
  Top 0.178: R59.1 42.58,47.59 42.93,47.24 v42.93,44.2 43.56,44.2 44.27,44.9 U9.1
  Bottom 0.178: JP17.2 v42.93,44.2
GND  (via drill 0.38)
  other vias: 6.35,13.72 10.92,10.16 12.7,13.34 12.7,5.08
  pour Top (isolate 0.178): 0,0 17.78,0 17.78,17.78 0,17.78
  pour Bottom (isolate 0.178): 0,17.78 17.78,17.78 17.78,0 0,0
GND1  (via drill 0.38)
  other vias: 24.64,13.72 29.21,10.16 30.99,13.34 30.99,5.08
  pour Top (isolate 0.178): 18.29,0 36.07,0 36.07,17.78 18.29,17.78
  pour Bottom (isolate 0.178): 18.29,17.78 36.07,17.78 36.07,0 18.29,0
GND2  (via drill 0.38)
  other vias: 42.93,13.72 47.5,10.16 49.28,13.34 49.28,5.08
  pour Top (isolate 0.178): 36.58,0 54.36,0 54.36,17.78 36.58,17.78
  pour Bottom (isolate 0.178): 36.58,17.78 54.36,17.78 54.36,0 36.58,0
GND3  (via drill 0.38)
  other vias: 6.35,32 10.92,28.45 12.7,31.62 12.7,23.37
  pour Top (isolate 0.178): 0,18.29 17.78,18.29 17.78,36.07 0,36.07
  pour Bottom (isolate 0.178): 0,36.07 17.78,36.07 17.78,18.29 0,18.29
GND4  (via drill 0.38)
  other vias: 24.64,32 29.21,28.45 30.99,31.62 30.99,23.37
  pour Top (isolate 0.178): 18.29,18.29 36.07,18.29 36.07,36.07 18.29,36.07
  pour Bottom (isolate 0.178): 18.29,36.07 36.07,36.07 36.07,18.29 18.29,18.29
GND5  (via drill 0.38)
  other vias: 42.93,32 47.5,28.45 49.28,31.62 49.28,23.37
  pour Top (isolate 0.178): 36.58,18.29 54.36,18.29 54.36,36.07 36.58,36.07
  pour Bottom (isolate 0.178): 36.58,36.07 54.36,36.07 54.36,18.29 36.58,18.29
GND6  (via drill 0.38)
  other vias: 6.35,50.29 10.92,46.74 12.7,49.91 12.7,41.66
  pour Top (isolate 0.178): 0,36.58 17.78,36.58 17.78,54.36 0,54.36
  pour Bottom (isolate 0.178): 0,54.36 17.78,54.36 17.78,36.58 0,36.58
GND7  (via drill 0.38)
  other vias: 24.64,50.29 29.21,46.74 30.99,49.91 30.99,41.66
  pour Top (isolate 0.178): 18.29,36.58 36.07,36.58 36.07,54.36 18.29,54.36
  pour Bottom (isolate 0.178): 18.29,54.36 36.07,54.36 36.07,36.58 18.29,36.58
GND8  (via drill 0.38)
  other vias: 42.93,50.29 47.5,46.74 49.28,49.91 49.28,41.66
  pour Top (isolate 0.178): 36.58,36.58 54.36,36.58 54.36,54.36 36.58,54.36
  pour Bottom (isolate 0.178): 36.58,54.36 54.36,54.36 54.36,36.58 36.58,36.58
N$1  (via drill 0.38)
  Top 0.178: R3.2 19.98,12.28 v19.56,12.7
  Bottom 0.178: v19.56,12.7 20.45,12.7 20.83,12.32 JP4.3
N$2  (via drill 0.38)
  Top 0.178: R4.2 19.98,8.04 v19.56,7.62
  Bottom 0.178: v19.56,7.62 20.45,7.62 20.83,8 JP4.1
N$3  (via drill 0.38)
  Top 0.178: R15.2 38.27,12.28 v37.85,12.7
  Bottom 0.178: v37.85,12.7 38.73,12.7 39.12,12.32 JP6.3
N$4  (via drill 0.38)
  Top 0.178: R13.2 1.69,12.28 v1.27,12.7
  Bottom 0.178: v1.27,12.7 2.16,12.7 2.54,12.32 JP1.3
N$5  (via drill 0.38)
  Top 0.178: R14.2 1.69,8.04 v1.27,7.62
  Bottom 0.178: v1.27,7.62 2.16,7.62 2.54,8 JP1.1
N$6  (via drill 0.38)
  Top 0.178: R16.2 38.27,8.04 v37.85,7.62
  Bottom 0.178: v37.85,7.62 38.73,7.62 39.12,8 JP6.1
N$7  (via drill 0.38)
  Top 0.178: R22.2 1.69,30.57 v1.27,30.99
  Bottom 0.178: v1.27,30.99 2.16,30.99 2.54,30.61 JP8.3
N$8  (via drill 0.38)
  Top 0.178: R23.2 1.69,26.33 v1.27,25.91
  Bottom 0.178: v1.27,25.91 2.16,25.91 2.54,26.29 JP8.1
N$9  (via drill 0.38)
  Top 0.178: R29.2 19.98,30.57 v19.56,30.99
  Bottom 0.178: v19.56,30.99 20.45,30.99 20.83,30.61 JP10.3
N$10  (via drill 0.38)
  Top 0.178: R30.2 19.98,26.33 v19.56,25.91
  Bottom 0.178: v19.56,25.91 20.45,25.91 20.83,26.29 JP10.1
N$11  (via drill 0.38)
  Top 0.178: R36.2 38.27,30.57 v37.85,30.99
  Bottom 0.178: v37.85,30.99 38.73,30.99 39.12,30.61 JP12.3
N$12  (via drill 0.38)
  Top 0.178: R37.2 38.27,26.33 v37.85,25.91
  Bottom 0.178: v37.85,25.91 38.73,25.91 39.12,26.29 JP12.1
N$13  (via drill 0.38)
  Top 0.178: R43.2 1.69,48.86 v1.27,49.28
  Bottom 0.178: v1.27,49.28 2.16,49.28 2.54,48.9 JP14.3
N$14  (via drill 0.38)
  Top 0.178: R44.2 1.69,44.62 v1.27,44.2
  Bottom 0.178: v1.27,44.2 2.16,44.2 2.54,44.58 JP14.1
N$15  (via drill 0.38)
  Top 0.178: R50.2 19.98,48.86 v19.56,49.28
  Bottom 0.178: v19.56,49.28 20.45,49.28 20.83,48.9 JP16.3
N$16  (via drill 0.38)
  Top 0.178: R51.2 19.98,44.62 v19.56,44.2
  Bottom 0.178: v19.56,44.2 20.45,44.2 20.83,44.58 JP16.1
N$17  (via drill 0.38)
  Top 0.178: R57.2 38.27,48.86 v37.85,49.28
  Bottom 0.178: v37.85,49.28 38.73,49.28 39.12,48.9 JP18.3
N$18  (via drill 0.38)
  Top 0.178: R58.2 38.27,44.62 v37.85,44.2
  Bottom 0.178: v37.85,44.2 38.73,44.2 39.12,44.58 JP18.1
NTC_SENSE  (via drill 0.38)
  Top 0.178: 10.16,8.13 9.65,8.13 9.49,8.29 U2.4 | 10.16,8.13 v11.43,8.13 | U2.5 10.09,8.2 10.16,8.13
  Bottom 0.178: v11.43,8.13 14.48,8.13 R12.P$2
NTC_SENSE1  (via drill 0.38)
  Top 0.178: 28.45,8.13 27.94,8.13 27.78,8.29 U1.4 | 28.45,8.13 v29.72,8.13 | U1.5 28.38,8.2 28.45,8.13
  Bottom 0.178: v29.72,8.13 32.77,8.13 R8.P$2
NTC_SENSE2  (via drill 0.38)
  Top 0.178: 46.74,8.13 46.23,8.13 46.07,8.29 U3.4 | 46.74,8.13 v48.01,8.13 | U3.5 46.67,8.2 46.74,8.13
  Bottom 0.178: v48.01,8.13 51.05,8.13 R19.P$2
NTC_SENSE3  (via drill 0.38)
  Top 0.178: 10.16,26.42 9.65,26.42 9.49,26.58 U4.4 | 10.16,26.42 v11.43,26.42 | U4.5 10.09,26.49 10.16,26.42
  Bottom 0.178: v11.43,26.42 14.48,26.42 R26.P$2
NTC_SENSE4  (via drill 0.38)
  Top 0.178: 28.45,26.42 27.94,26.42 27.78,26.58 U5.4 | 28.45,26.42 v29.72,26.42 | U5.5 28.38,26.49 28.45,26.42
  Bottom 0.178: v29.72,26.42 32.77,26.42 R33.P$2
NTC_SENSE5  (via drill 0.38)
  Top 0.178: 46.74,26.42 46.23,26.42 46.07,26.58 U6.4 | 46.74,26.42 v48.01,26.42 | U6.5 46.67,26.49 46.74,26.42
  Bottom 0.178: v48.01,26.42 51.05,26.42 R40.P$2
NTC_SENSE6  (via drill 0.38)
  Top 0.178: 10.16,44.7 9.65,44.7 9.49,44.87 U7.4 | 10.16,44.7 v11.43,44.7 | U7.5 10.09,44.77 10.16,44.7
  Bottom 0.178: v11.43,44.7 14.48,44.7 R47.P$2
NTC_SENSE7  (via drill 0.38)
  Top 0.178: 28.45,44.7 27.94,44.7 27.78,44.87 U8.4 | 28.45,44.7 v29.72,44.7 | U8.5 28.38,44.77 28.45,44.7
  Bottom 0.178: v29.72,44.7 32.77,44.7 R54.P$2
NTC_SENSE8  (via drill 0.38)
  Top 0.178: 46.74,44.7 46.23,44.7 46.07,44.87 U9.4 | 46.74,44.7 v48.01,44.7 | U9.5 46.67,44.77 46.74,44.7
  Bottom 0.178: v48.01,44.7 51.05,44.7 R61.P$2
SCL  (via drill 0.38)
  Top 0.178: v3.81,6.35 3.81,7.62 3.39,8.04 R14.1 3.39,9.87 4.32,10.79 4.32,11.68 4.57,11.94 7.49,11.94 7.69,11.74 U2.10
  Bottom 0.178: v3.81,6.35 5.08,6.35 8.89,2.54 J8.4
SCL1  (via drill 0.38)
  Top 0.178: v22.1,6.35 22.1,7.62 21.68,8.04 R4.1 21.68,9.87 22.61,10.79 22.61,11.68 22.86,11.94 25.78,11.94 25.98,11.74 U1.10
  Bottom 0.178: v22.1,6.35 23.37,6.35 27.18,2.54 J1.4
SCL2  (via drill 0.38)
  Top 0.178: v40.39,6.35 40.39,7.62 39.97,8.04 R16.1 39.97,9.87 40.89,10.79 40.89,11.68 41.15,11.94 44.07,11.94 44.27,11.74 U3.10
  Bottom 0.178: v40.39,6.35 41.66,6.35 45.47,2.54 J4.4
SCL3  (via drill 0.38)
  Top 0.178: v3.81,24.64 3.81,25.91 3.39,26.33 R23.1 3.39,28.16 4.32,29.08 4.32,29.97 4.57,30.23 7.49,30.23 7.69,30.03 U4.10
  Bottom 0.178: v3.81,24.64 5.08,24.64 8.89,20.83 J6.4
SCL4  (via drill 0.38)
  Top 0.178: v22.1,24.64 22.1,25.91 21.68,26.33 R30.1 21.68,28.16 22.61,29.08 22.61,29.97 22.86,30.23 25.78,30.23 25.98,30.03 U5.10
  Bottom 0.178: v22.1,24.64 23.37,24.64 27.18,20.83 J9.4
SCL5  (via drill 0.38)
  Top 0.178: v40.39,24.64 40.39,25.91 39.97,26.33 R37.1 39.97,28.16 40.89,29.08 40.89,29.97 41.15,30.23 44.07,30.23 44.27,30.03 U6.10
  Bottom 0.178: v40.39,24.64 41.66,24.64 45.47,20.83 J11.4
SCL6  (via drill 0.38)
  Top 0.178: v3.81,42.93 3.81,44.2 3.39,44.62 R44.1 3.39,46.44 4.32,47.37 4.32,48.26 4.57,48.51 7.49,48.51 7.69,48.32 U7.10
  Bottom 0.178: v3.81,42.93 5.08,42.93 8.89,39.12 J13.4
SCL7  (via drill 0.38)
  Top 0.178: v22.1,42.93 22.1,44.2 21.68,44.62 R51.1 21.68,46.44 22.61,47.37 22.61,48.26 22.86,48.51 25.78,48.51 25.98,48.32 U8.10
  Bottom 0.178: v22.1,42.93 23.37,42.93 27.18,39.12 J15.4
SCL8  (via drill 0.38)
  Top 0.178: v40.39,42.93 40.39,44.2 39.97,44.62 R58.1 39.97,46.44 40.89,47.37 40.89,48.26 41.15,48.51 44.07,48.51 44.27,48.32 U9.10
  Bottom 0.178: v40.39,42.93 41.66,42.93 45.47,39.12 J17.4
SDA  (via drill 0.38)
  Top 0.178: R13.1 3.39,12.15 3.68,12.45 6.1,12.45 v6.35,12.7 6.6,12.45 7.87,12.45 8.29,12.03 U2.9
  Bottom 0.178: J8.3 7.62,5.08 7.62,11.43 v6.35,12.7
SDA1  (via drill 0.38)
  Top 0.178: R3.1 21.68,12.15 21.97,12.45 24.38,12.45 v24.64,12.7 24.89,12.45 26.16,12.45 26.58,12.03 U1.9
  Bottom 0.178: J1.3 25.91,5.08 25.91,11.43 v24.64,12.7
SDA2  (via drill 0.38)
  Top 0.178: R15.1 39.97,12.15 40.26,12.45 42.67,12.45 v42.93,12.7 43.18,12.45 44.45,12.45 44.87,12.03 U3.9
  Bottom 0.178: J4.3 44.2,5.08 44.2,11.43 v42.93,12.7
SDA3  (via drill 0.38)
  Top 0.178: R22.1 3.39,30.44 3.68,30.73 6.1,30.73 v6.35,30.99 6.6,30.73 7.87,30.73 8.29,30.32 U4.9
  Bottom 0.178: J6.3 7.62,23.37 7.62,29.72 v6.35,30.99
SDA4  (via drill 0.38)
  Top 0.178: R29.1 21.68,30.44 21.97,30.73 24.38,30.73 v24.64,30.99 24.89,30.73 26.16,30.73 26.58,30.32 U5.9
  Bottom 0.178: J9.3 25.91,23.37 25.91,29.72 v24.64,30.99
SDA5  (via drill 0.38)
  Top 0.178: R36.1 39.97,30.44 40.26,30.73 42.67,30.73 v42.93,30.99 43.18,30.73 44.45,30.73 44.87,30.32 U6.9
  Bottom 0.178: J11.3 44.2,23.37 44.2,29.72 v42.93,30.99
SDA6  (via drill 0.38)
  Top 0.178: R43.1 3.39,48.73 3.68,49.02 6.1,49.02 v6.35,49.28 6.6,49.02 7.87,49.02 8.29,48.61 U7.9
  Bottom 0.178: J13.3 7.62,41.66 7.62,48.01 v6.35,49.28
SDA7  (via drill 0.38)
  Top 0.178: R50.1 21.68,48.73 21.97,49.02 24.38,49.02 v24.64,49.28 24.89,49.02 26.16,49.02 26.58,48.61 U8.9
  Bottom 0.178: J15.3 25.91,41.66 25.91,48.01 v24.64,49.28
SDA8  (via drill 0.38)
  Top 0.178: R57.1 39.97,48.73 40.26,49.02 42.67,49.02 v42.93,49.28 43.18,49.02 44.45,49.02 44.87,48.61 U9.9
  Bottom 0.178: J17.3 44.2,41.66 44.2,48.01 v42.93,49.28

## Text on the board
Bottom: X10 | X10 | X10 | X10 | X10 | X10 | X10 | X10 | X10
tPlace: CCS811 | CCS811 | CCS811 | Air Quality | Air Quality | Air Quality | NTC | NTC | NTC | !RST | !INT | !WAK | SCL | SDA | 3.3V | GND | !RST | !INT | !WAK | SCL | SDA | 3.3V | GND | !RST | !INT | !WAK | SCL | SDA | 3.3V | GND | CCS811 | CCS811 | CCS811 | Air Quality | Air Quality | Air Quality | NTC | NTC | NTC | !RST | !INT | !WAK | SCL | SDA | 3.3V | GND | !RST | !INT | !WAK | SCL | SDA | 3.3V | GND | !RST | !INT | !WAK | SCL | SDA | 3.3V | GND | CCS811 | CCS811 | CCS811 | Air Quality | Air Quality | Air Quality | NTC | NTC | NTC | !RST | !INT | !WAK | SCL | SDA | 3.3V | GND | !RST | !INT | !WAK | SCL | SDA | 3.3V | GND | !RST | !INT | !WAK | SCL | SDA | 3.3V | GND
bPlace: I2C PU | ADDR | I2C PU | ADDR | I2C PU | ADDR | !RST | !INT | !WAK | SCL | SDA | 3.3V | GND | !RST | !INT | !WAK | SCL | SDA | 3.3V | GND | !RST | !INT | !WAK | SCL | SDA | 3.3V | GND | I2C PU | ADDR | I2C PU | ADDR | I2C PU | ADDR | !RST | !INT | !WAK | SCL | SDA | 3.3V | GND | !RST | !INT | !WAK | SCL | SDA | 3.3V | GND | !RST | !INT | !WAK | SCL | SDA | 3.3V | GND | I2C PU | ADDR | I2C PU | ADDR | I2C PU | ADDR | !RST | !INT | !WAK | SCL | SDA | 3.3V | GND | !RST | !INT | !WAK | SCL | SDA | 3.3V | GND | !RST | !INT | !WAK | SCL | SDA | 3.3V | GND